# Altium PCB MAGI'sBoostPower.PcbDoc
Units mm, origin at the board's own origin, x right, y up, seen from the top; angles counter-clockwise.
Board outline 152.4 x 101.6 mm, 2 copper layers (Top Layer, Bottom Layer); 22 components, 13 nets, 98 pads, 109 vias.
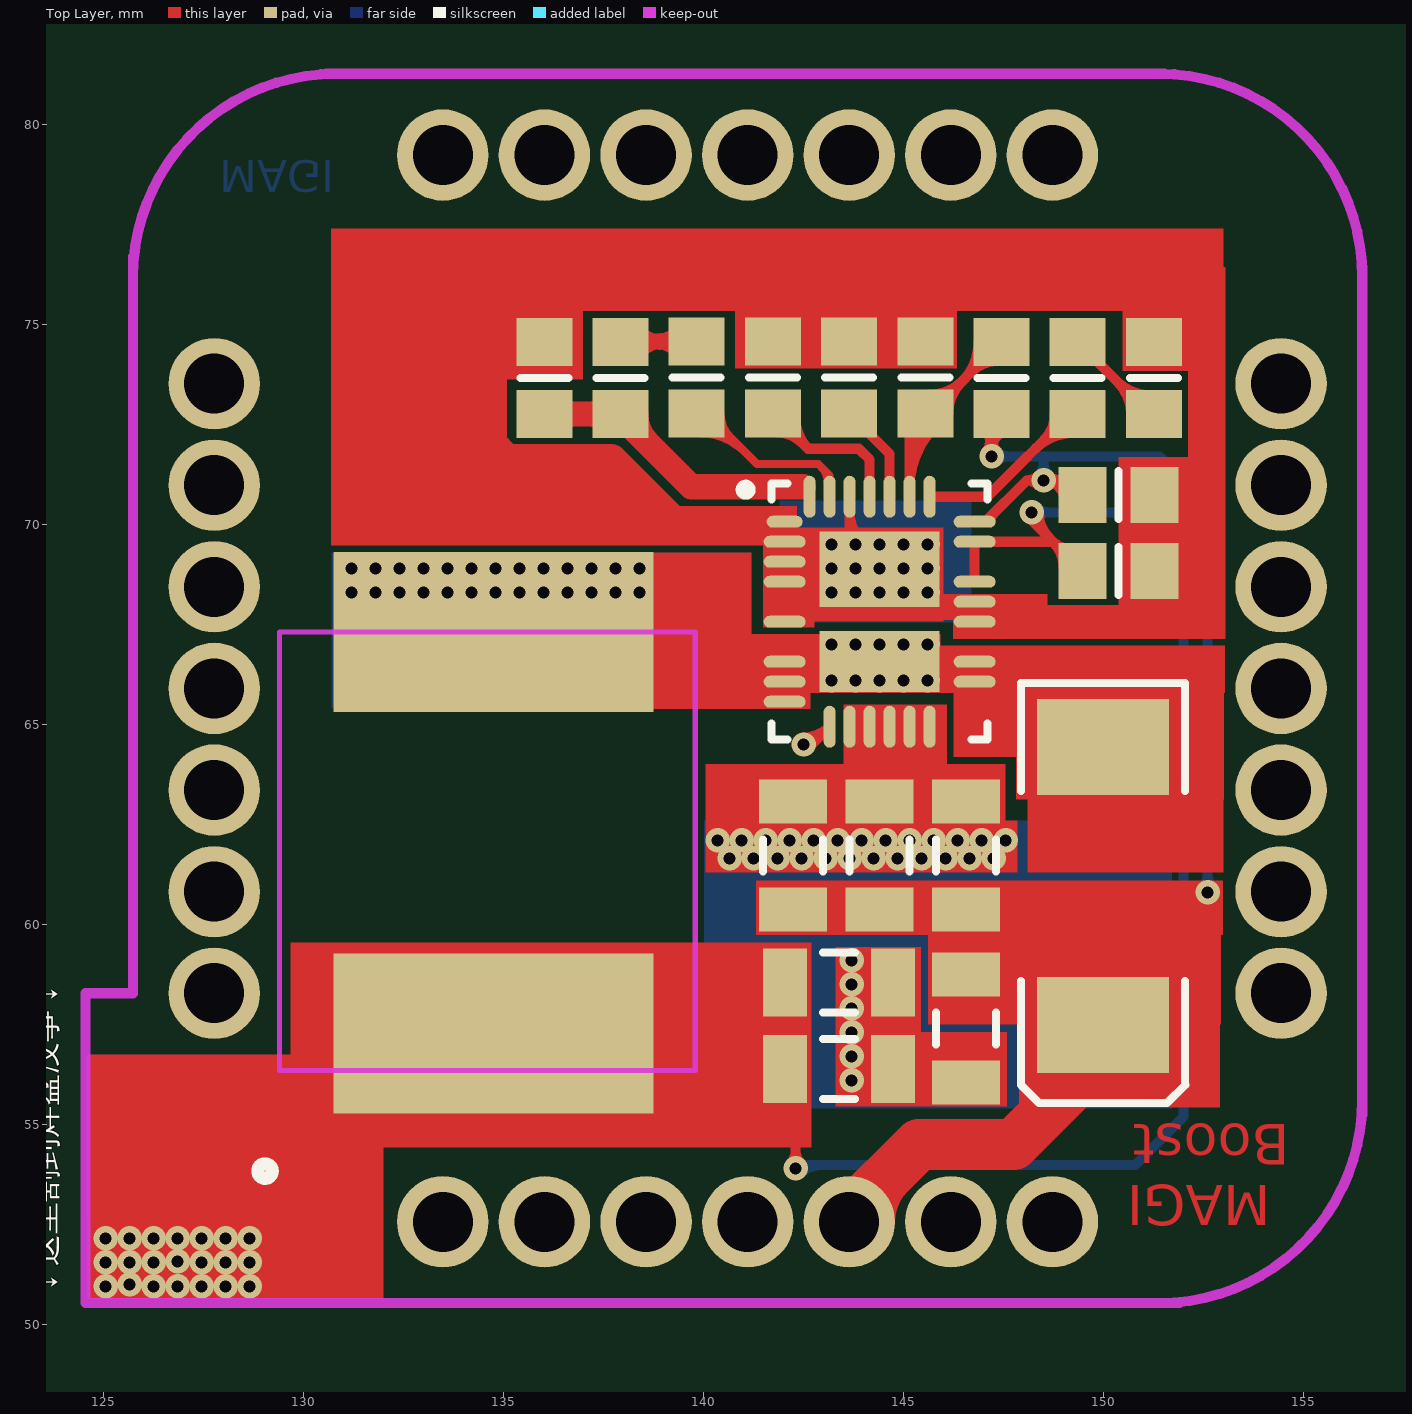
[diagram p0: Top Layer view]
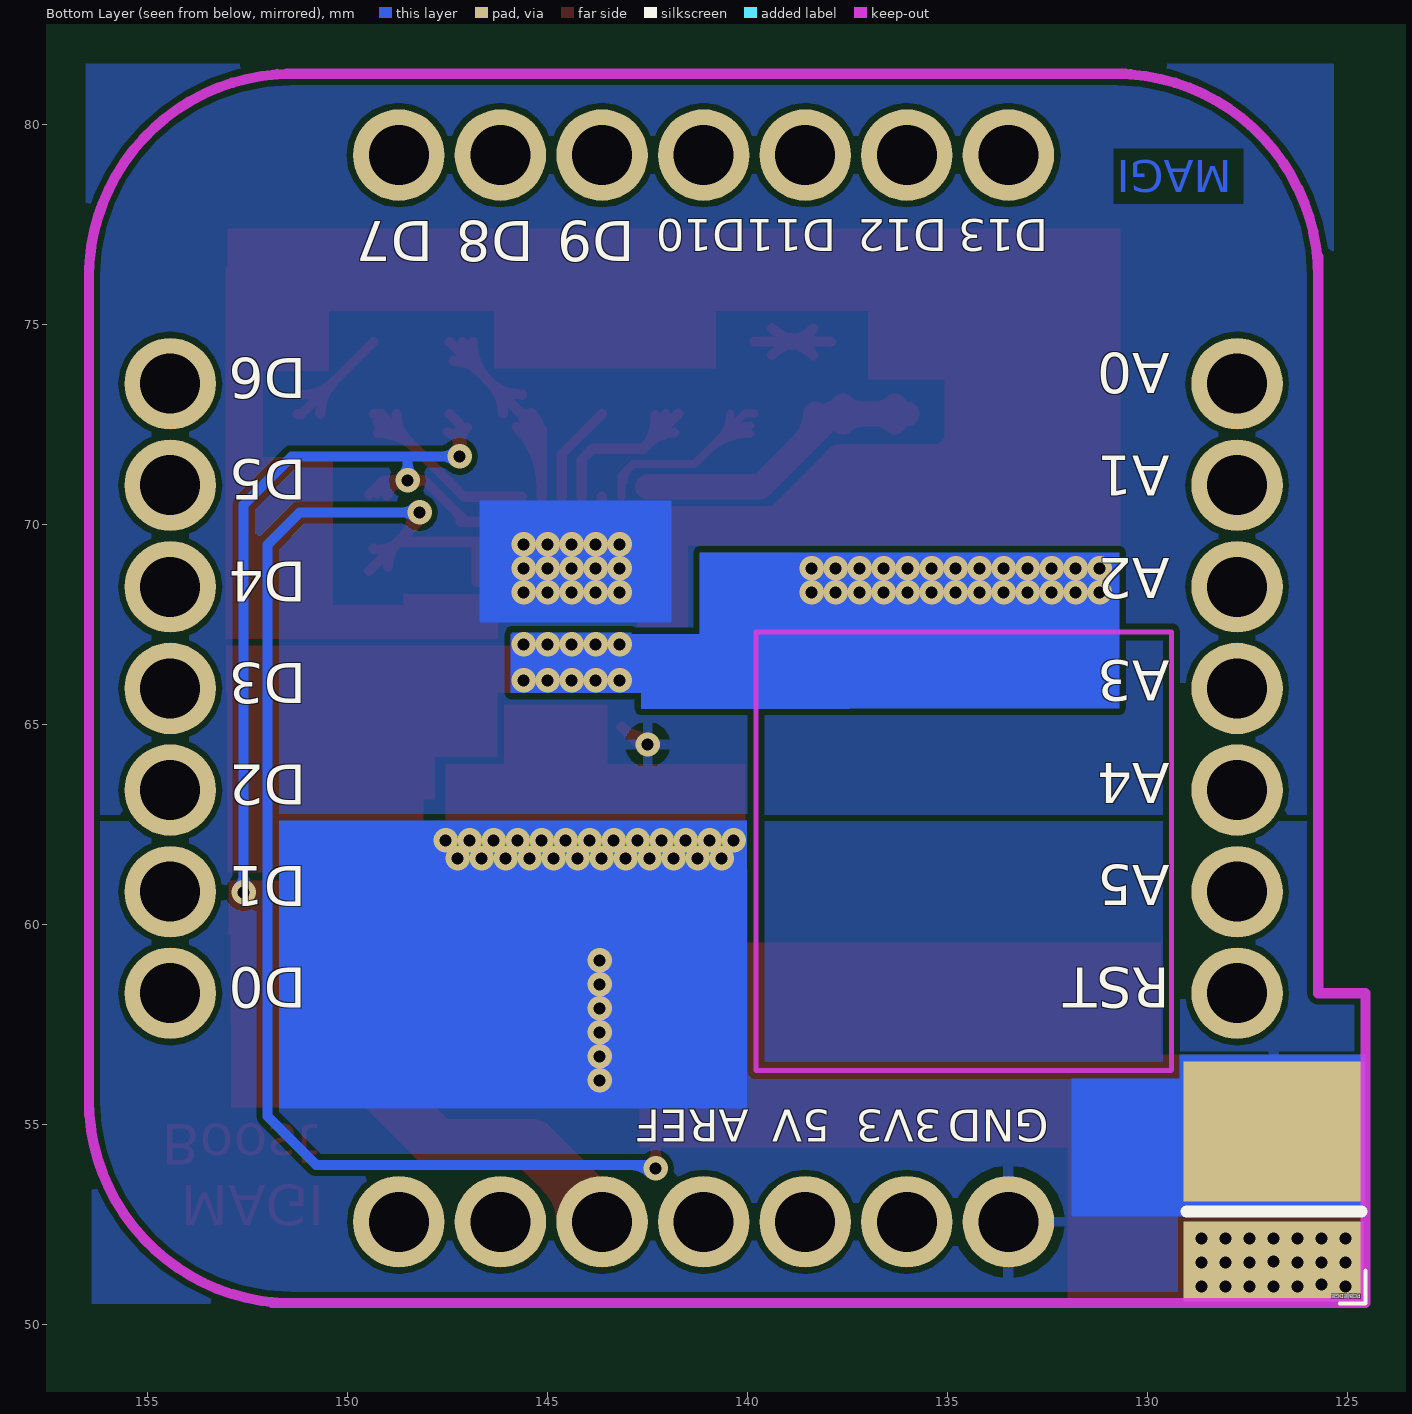
[diagram p1: Bottom Layer view, seen from below]

## Layer stack, top to bottom
Top Solder: solder mask 0.0102, Solder Resist, Dk 3.5
Top Layer: signal copper 0.0356
Dielectric 1: dielectric 0.32, FR-4, Dk 4.8
Bottom Layer: signal copper 0.0356
Bottom Solder: solder mask 0.0102, Solder Resist, Dk 3.5

## Board outline
25.4,25.4 177.8,25.4 177.8,127 25.4,127

## Design rules (kind name [scope] priority, off if disabled: settings)
Clearance [All] p1: gap=0.152
PolygonConnect [All] p1: connectstyle=Relief reliefconductorwidth=0.254 reliefentries=4 polygonreliefangle="90 Angle" airgapwidth=0.254
RoutingVias [All] p1: holewidth=0.711 width=1.27 viastyle="Through Hole" minholewidth=0.711 minwidth=1.27 maxholewidth=0.711 maxwidth=1.27
SolderMaskExpansion [All] p1: expansion=0.102
Width [All] p1: maxlimit=2.54 minlimit=0.152 preferedwidth=0.254
29 further rules are at their usual default settings.

## Components (designator, comment, footprint, x,y, rotation, side; value= is the part's Value field where it differs from the comment)
C1 "1uf" 6-0805_N 143.637,73.671 r90 top
C2 "1uf" 6-0805_N 149.352,73.66 r90 top
C3 "1uf" 6-0805_N 136.017,73.66 r90 top
C4 "CAP_1" C1206 144.399,61.722 r90 top
C5 "CAP_1" C1206 146.558,61.722 r90 top
C6 "CAP_1" C1206 142.24,61.722 r90 top
C7 "CAP_1" C1206 146.558,57.404 r270 top
C8 "CAP_1" C1206 143.383,58.547 r0 top
C9 "CAP_1" C1206 143.383,56.388 r0 top
C10 "CAP_1" 6-0805_n 150.368,70.739 r0 top
C11 "CAP_1" 6-0805_n 150.368,68.834 r0 top
D1 "DIODE_1" SMC 149.987,60.96 r270 top
D2 "LED_0805" 6-0805_n 137.922,73.66 r90 top
J1 "MAGIsBoard" MAGIsBoard 141.1,65.9 r180 top
J2 "CON2" T-Mini 126.85,53.2 r0 bottom
L1 "INDUCTOR" 10*10 134.747,62.23 r270 top
R1 "0805" 6-0805_N 151.257,73.66 r270 top
R2 "0805" 6-0805_N 145.542,73.671 r270 top
R3 "0805" 6-0805_N 141.732,73.671 r270 top
R4 "0805" 6-0805_N 139.827,73.671 r270 top
R5 "0805" 6-0805_N 147.447,73.66 r270 top
U1 "LT3959" LT3959 144.399,67.818 r270 top

## Footprints (in the part's own frame and the unit in brackets; to place one, negate y for a bottom-side part, rotate by r counter-clockwise, add the part's x,y. Pads: shape width x height; smd on the part's side, far side on the other; paste and mask are expansions set on the pad)
6-0805_N [mm] "Chip Resistor, Body 2.0x1.2mm, IPC Medium Density"
  rect 1.2x1.4 smd: 1(-0.9,0) 2(0.9,0)
  silkscreen extent 0,-0.6 0,0.6, body extent -1.07,-0.7 1.07,0.7, height 0.7
6-0805_n [mm] "Chip Resistor, Body 2.0x1.2mm, IPC Medium Density"
  rect 1.2x1.4 smd: 1(-0.9,0) 2(0.9,0)
  silkscreen extent 0,-0.6 0,0.6, body extent -1.07,-0.7 1.07,0.7, height 0.7
10*10 [mm]
  rect 4x8 smd: 1(-5.08,0) 2(4.953,0)
C1206 [mm] "Chip Capacitor, Body 3.2x1.6mm, IPC High Density"
  rect 1.1x1.7 smd: 1(-1.35,0) 2(1.35,0)
  silkscreen extent -0.4,-0.75 0.4,0.75, body extent -1.7,-0.9 1.7,0.9, height 1.3
LT3959 [mm]
  oval 0.3x0.9 smd: 1(-2.25,-2.375)
  oval 0.3x1.05 smd: 2(-1.75,-2.375) 3(-1.25,-2.375) 4(-0.75,-2.375) 6(0.25,-2.375) 8(1.25,-2.375) 9(1.75,-2.375) 10(2.25,-2.375) 20(1.75,2.375) 21(1.25,2.375) 23(0.25,2.375) 24(-0.25,2.375) 25(-0.75,2.375) 27(-1.75,2.375) 28(-2.25,2.375)
  oval 1.05x0.3 smd: 12(2.875,-1.25) 13(2.875,-0.75) 14(2.875,-0.25) 15(2.875,0.25) 16(2.875,0.75) 17(2.875,1.25) 30(-2.875,1.25) 31(-2.875,0.75) 32(-2.875,0.25) 33(-2.875,-0.25) 34(-2.875,-0.75) 35(-2.875,-1.25) 36(-2.875,-1.75)
  rect 1.88x3 smd: 37(-1.06,0)
  rect 1.53x3 smd: 38(1.245,0)
  silkscreen extent -3.2,-3.47 3.2,2.7, body extent -3.05,-2.55 3.05,2.55, height 0.8
MAGIsBoard [mil]
  round 90 hole 59.06: 1(300,525) 2(200,525) 3(100,525) 4(0,525) 5(-100,525) 6(-200,525) 7(-300,525) 8(-525,300) 9(-525,200) 10(-525,100) 11(-525,0) 12(-525,-100) 13(-525,-200) 14(-525,-300) 15(-300,-525) 16(-200,-525) 17(-100,-525) 18(0,-525) 19(100,-525) 20(200,-525) 21(300,-525) 22(525,-300) 23(525,-200) 24(525,-100) 25(525,0) 26(525,100) 27(525,200) 28(525,300)
  Keep-Out Layer lines w10: 605,300 605,-425 ; 605,-405 cw(c405,-405) 405,-605 ; 425,605 -425,605 ; 415,-605 -410,-605 ; -405,605 ccw(c-405,405) -605,405 ; -405,-605 cw(c-405,-405) -605,-405 ; -605,420 -605,290 -605,-415
  silkscreen extent 468,468 482,482
SMC [mm] "DO-214-AB/SMC; 2 C-Bend Leads; Body 7.9 x 5.9 mm, inc. leads (LxW)"
  rect 2.4x3.3 smd: 1(-3.475,0) 2(3.475,0)
  silkscreen extent -5.07,-2.05 5.43,2.05
T-Mini [mm]
  rect 4.5x2 smd: 1(0,1.625)
  rect 4.5x3.5 smd: 2(0,-1.625)
  silkscreen extent -2.3,0.38 2.18,2.68

## Part data
C1 C2 C3: library part CAP_1, "Capacitor"
C4 C5 C6 C7 C8 C9 C10 C11: "Capacitor"
D1: "Diode"
D2: "LED"
J2: "Connector"
R1 R2 R3 R4 R5: library part RES1_1

## Via types
v1: diameter 0.61, hole 0.305, Top Layer to Bottom Layer, 109 vias

## Nets (pads, with @x,y where several pads share a name; then routed paths per layer and width w, separated by ;. In a path a pad name is that pad's centre, name@x,y a point inside that pad or via, vN(x,y) a via of type N, cw(c..) or ccw(c..) an arc to the next point about the centre after c; other vN are vias at no path point)
GND: C1.2 C3.2 C10.2 C11.2 R1.1 R2.1 R3.1 U1.1 U1.2 U1.3 U1.4 U1.6 U1.12 U1.23 U1.24 U1.34 U1.37 | length 30.2
  Top Layer w0.254: 140.38,69.95 140.498,70.068 ; R3.1 R2.1 ; R3.1@142.166,74.237 cw(c142.974,73.429) 142.974,74.571 cw(c142.974,75.713) R3.1@142.166,74.905 ; R3.1@142.22,74.3 cw(c142.602,74.033) 142.722,74.483 ; R3.1@142.22,74.842 ccw(c142.602,75.109) 142.722,74.659 ; R3.1@142.242,74.334 cw(c142.8,74.012) 142.633,74.635 ; R3.1@142.242,74.807 ccw(c142.8,75.13) 142.633,74.507 ; v1(142.5,64.5) 142.706,64.5 U1.12 cw(c142.508,65.584) v1@142.501,64.678 ; C1.2@143.203,74.237 ccw(c142.395,73.429) 142.395,74.571 ccw(c142.395,75.713) C1.2@143.203,74.905 ; U1.34@143.649,70.294 ccw(c144.594,70.294) U1.37@143.926,69.626 ; U1.34 U1.37@143.649,69.628 ; U1.37@143.667,69.018 ccw(c143.334,69.313) U1.37@143.649,69.628 ; U1.37@143.8,69.322 cw(c143.8,68.948) U1.37@144.064,69.213 ; U1.37@143.84,69.437 cw(c143.536,69.134) U1.37@143.857,68.849 ; U1.37@143.961,69.432 ccw(c144.619,69.811) U1.37@144.442,69.073 ; U1.37@143.978,69.5 ccw(c144.463,69.5) U1.37@144.12,69.157 ; U1.37@144.057,69.22 ccw(c144.4,69.563) U1.37@144.4,69.078 ; C1.2@144.071,74.237 cw(c144.879,73.429) 144.879,74.571 cw(c144.879,75.713) C1.2@144.071,74.905 ; U1.37@144.087,69.214 ccw(c144.332,69.356) U1.37@144.374,69.076 ; U1.37@144.113,69.164 cw(c143.848,68.9) U1.37@144.222,68.9 ; U1.37 U1.37@143.649,69.628 ; 144.552,74.483 cw(c144.672,74.033) R2.1@145.054,74.3 ; 144.552,74.659 ccw(c144.672,75.109) R2.1@145.054,74.842 ; 144.641,74.507 ccw(c144.474,75.13) R2.1@145.032,74.807 ; 144.641,74.635 cw(c144.474,74.012) R2.1@145.032,74.334 ; R2.1@145.108,74.237 ccw(c144.3,73.429) 144.3,74.571 ccw(c144.3,75.713) R2.1@145.108,74.905
  Top Layer w0.889: 134.593,72.087 134.593,72.04 135.07,71.563 137.68,71.563 139.293,69.95 140.38,69.95
  other v1: 143.2,68.3 143.8,68.3 144.4,68.3 145,68.3 145.6,68.3 143.2,68.9 143.8,68.9 144.4,68.9 145,68.9 145.6,68.9 143.2,69.5 143.8,69.5 144.4,69.5 145,69.5 145.6,69.5
NetC1_1: C1.1 U1.32 | length 2.5
  Top Layer w0.254: C1.1 144.649,71.759 U1.32
NetC2_1: C2.1 U1.30 | length 6.9
  Top Layer w0.254: U1.30 147.093,70.693 149.16,72.76 C2.1 ; 148.287,71.887 cw(c149.252,70.923) C2.1@149.252,72.287 ; 148.51,72.11 ccw(c147.859,72.76) C2.1@148.779,72.76 ; C2.1@148.721,72.321 cw(c149.252,71.79) C2.1@149.252,72.541
NetC2_2: C2.2 R1.2 | length 4.4
  Top Layer w0.254: C2.2 151.152,72.76 R1.2 ; 150.341,73.571 ccw(c151.157,74.387) R1.2@151.157,73.233 ; 150.353,73.559 cw(c149.554,72.76) R1.2@150.684,72.76
NetC3_1: C3.1 D2.1 U1.36 | length 10.2
  Top Layer w0.635: C3.1 D2.1 137.922,72.711 139.694,70.939 142.494,70.939 ; C3.1@136.317,72.56 cw(c136.799,72.078) 136.799,72.76 cw(c136.799,73.442) C3.1@136.317,72.96 ; D2.1@137.622,72.56 ccw(c137.14,72.078) 137.14,72.76 ccw(c137.14,73.442) D2.1@137.622,72.96 ; D2.1@138.304,72.76 ccw(c139.345,72.76) 138.609,72.024
NetD2_2: D2.2 R4.1 | length 7.6
  Top Layer w0.254: D2.2 137.933,74.571 R4.1 ; D2.2@138.356,74.226 cw(c139.19,73.392) R4.1@139.19,74.571 ; D2.2@138.356,74.894 ccw(c139.137,75.675) R4.1@139.137,74.571 ; D2.2@138.399,74.846 ccw(c138.8,75.149) 138.93,74.663 ; D2.2@138.42,74.305 cw(c138.783,74.072) 138.894,74.488 ; D2.2@138.432,74.324 cw(c139.021,73.983) 138.845,74.641 ; D2.2@138.432,74.796 ccw(c138.958,75.101) 138.801,74.513 ; R4.1@139.393,74.237 ccw(c138.585,73.429) 138.585,74.571 ccw(c138.585,75.713) R4.1@139.393,74.905
NetR2_2: R2.2 R5.1 U1.31 | length 12.7
  Top Layer w0.254: U1.31 145.149,72.378 R2.2 145.658,72.771 R5.1 ; U1.31@145.149,70.922 cw(c147.291,70.922) R2.2@145.776,72.437 ; 145.149,71.535 cw(c146.678,71.535) R2.2@145.597,72.616 ; 145.149,72.148 cw(c146.065,72.148) R2.2@145.417,72.796 ; R2.2@145.642,73.244 ccw(c145.642,74.425) 146.477,73.59 ; R2.2@146.115,72.771 cw(c147.218,72.771) 146.438,73.551 ; 146.469,73.582 ccw(c145.491,74.56) R5.1@146.874,74.56 ; 146.71,73.823 cw(c147.347,73.187) R5.1@147.347,74.087 ; R5.1@146.902,74.015 ccw(c146.358,74.56) R5.1@147.128,74.56
NetR3_2: R3.2 U1.33 | length 6
  Top Layer w0.254: R3.2 142.611,71.892 ; R3.2@141.832,72.298 cw(c141.832,71.398) 142.469,72.034 ; R3.2@142.05,72.753 ccw(c142.648,72.703) R3.2@142.224,72.279 ; R3.2@142.303,72.732 ccw(c143.364,72.644) 142.611,71.892 ; U1.33 144.149,71.624 143.881,71.892 142.611,71.892
NetR4_2: R4.2 U1.35 | length 7.6
  Top Layer w0.203: R4.2 140.073,72.771 141.333,71.511 142.865,71.511 143.149,71.227 U1.35 ; R4.2@139.927,72.273 cw(c139.927,70.717) 141.027,71.817 ; R4.2@139.927,72.476 cw(c139.927,71.411) 140.68,72.164 ; R4.2@140.425,72.771 ccw(c141.277,72.771) 140.675,72.169 ; 142.954,71.422 cw(c142.6,71.068) U1.35@143.101,71.068
PGND: C4.2 C5.2 C6.2 C7.2 C8.2 C9.2 J1.1 J2.2 U1.13 U1.14 U1.15 U1.16 U1.17
  other v1: 143.7,56.1 143.7,56.7 143.7,57.3 143.7,57.9 143.7,58.5 143.7,59.1 140.65,61.65 141.25,61.65 141.85,61.65 142.45,61.65 143.05,61.65 143.65,61.65 144.25,61.65 144.85,61.65 145.45,61.65 146.05,61.65 146.65,61.65 147.25,61.65 140.35,62.1 140.95,62.1 141.55,62.1 142.15,62.1 142.75,62.1 143.35,62.1 143.95,62.1 144.55,62.1 145.15,62.1 145.75,62.1 146.35,62.1 146.95,62.1 147.55,62.1
SW: D1.1 L1.1 U1.8 U1.9 U1.10 U1.20 U1.21 U1.38
  other v1: 143.2,66.1 143.8,66.1 144.4,66.1 145,66.1 145.6,66.1 143.2,67 143.8,67 144.4,67 145,67 145.6,67 131.2,68.3 131.8,68.3 132.4,68.3 133,68.3 133.6,68.3 134.2,68.3 134.8,68.3 135.4,68.3 136,68.3 136.6,68.3 137.2,68.3 137.8,68.3 138.4,68.3 131.2,68.9 131.8,68.9 132.4,68.9 133,68.9 133.6,68.9 134.2,68.9 134.8,68.9 135.4,68.9 136,68.9 136.6,68.9 137.2,68.9 137.8,68.9 138.4,68.9
VIN: C8.1 C9.1 C11.1 J2.1 L1.2 U1.25 U1.27 | length 41.1
  Top Layer w0.254: v1@142.174,54.026 ccw(c141.871,54.329) 142.3,54.329 ccw(c142.729,54.329) v1@142.426,54.026 ; 142.2,55.15 142.3,55.15 v1(142.3,53.9) ; U1.25 U1.27 148.734,69.568 ; v1(148.2,70.3) 148.2,70.102 148.734,69.568 ; v1@148.378,70.3 ccw(c149.285,70.3) 148.644,69.658 ; C11.1@148.995,68.935 ccw(c148.104,68.938) 148.734,69.568 ; C11.1@149.356,69.394 cw(c149.2,70.034) 148.734,69.568 ; C11.1 148.734,69.568
  Top Layer w0.508: C9.1@141.824,55.879 cw(c141.318,55.373) 142.033,55.373 cw(c142.748,55.373) C9.1@142.242,55.879 ; 142.033,55.367 C9.1
  Bottom Layer w0.254: v1(142.3,53.9) 142.387,53.987 150.787,53.987 152,55.2 152,69.5 151.2,70.3 v1(148.2,70.3) ; v1@142.426,53.774 cw(c142.94,53.26) 142.94,53.987 ; v1@148.326,70.174 cw(c148.629,69.871) 148.629,70.3 cw(c148.629,70.729) v1@148.326,70.426
  other v1: 125.05,50.95 126.25,50.95 126.85,50.95 127.45,50.95 128.05,50.95 128.65,50.95 125.65,51 125.05,51.55 125.65,51.55 126.25,51.55 127.45,51.55 128.05,51.55 128.65,51.55 126.85,51.575 125.05,52.15 125.65,52.15 126.25,52.15 126.85,52.15 127.45,52.15 128.05,52.15 128.65,52.15
VOUT: C4.1 C5.1 C6.1 C7.1 C10.1 D1.2 J1.5 R5.2 U1.28 | length 38.1
  Top Layer w0.254: U1.28 147.043,70.068 148.075,71.1 ; R5.2@147.013,72.426 cw(c146.56,71.973) v1@147.2,71.973 ; v1@147.065,71.815 ccw(c146.764,72.072) R5.2@147.146,72.175 ; v1@147.074,71.826 ccw(c146.771,72.129) 147.2,72.129 ccw(c147.629,72.129) v1@147.326,71.826 ; v1@147.111,71.854 ccw(c146.979,72.082) 147.234,72.014 ; U1.28@147.172,70.068 cw(c147.484,70.068) 147.263,70.289 ; v1@147.2,71.888 cw(c147.651,71.888) R5.2@147.503,72.313 ; v1@147.2,71.9 147.2,72.513 R5.2 ; 147.239,72.032 ccw(c147.409,71.986) v1@147.305,71.844 ; v1@148.373,70.975 ccw(c148.075,70.68) 148.075,71.1 ; v1@148.373,71.225 cw(c148.075,71.52) 148.075,71.1 ; v1@148.626,70.974 cw(c148.929,70.671) 148.929,71.1 cw(c148.929,71.529) v1@148.626,71.226 ; 148.835,71.1 cw(c148.835,70.662) C10.1@149.257,70.78 ; C10.1@149.013,70.711 ccw(c148.5,70.568) v1(148.5,71.1) ; C10.1 149.107,71.1 v1(148.5,71.1) ; 148.075,71.1 v1(148.5,71.1)
  Top Layer w1.27: J1.5 143.64,52.755 145.38,54.495 147.749,54.495 149.987,56.733 D1.2 ; J1.5@144.148,52.565 cw(c145.833,52.565) 144.642,53.757
  Bottom Layer w0.254: v1(147.2,71.7) 148.5,71.7 ; v1@147.326,71.574 cw(c147.629,71.271) 147.629,71.7 cw(c147.629,72.129) v1@147.326,71.826 ; v1@148.374,71.226 ccw(c148.071,71.529) 148.5,71.529 ccw(c148.929,71.529) v1@148.626,71.226 ; v1(148.5,71.1) 148.5,71.7 ; v1@152.474,60.926 ccw(c152.171,61.229) 152.6,61.229 ccw(c153.029,61.229) v1@152.726,60.926 ; v1(152.6,60.8) 152.6,70.5 151.4,71.7 148.5,71.7
pads on no net: J1.2 J1.3 J1.4 J1.6 J1.7 J1.8 J1.9 J1.10 J1.11 J1.12 J1.13 J1.14 J1.15 J1.16 J1.17 J1.18 J1.19 J1.20 J1.21 J1.22 J1.23 J1.24 J1.25 J1.26 J1.27 J1.28

## Polygon pours and split planes (outlines as drawn)
PGND on Bottom Layer "Keep-Out Layer-No Net" (solid, pour order 3): 141.176,62.582 156.426,62.582 156.393,62.582 156.393,50.515 124.476,50.515 124.476,58.262 125.526,58.262 125.626,58.262 125.626,62.582
GND on Bottom Layer "Keep-Out Layer-No Net" (solid, pour order 2): 125.35,81.52 156.55,81.52 156.55,50.42 124.2,50.42 124.2,58.47 125.35,58.47

## Keep-outs
Keep-Out Layer:
  lines w0.127: 129.4,56.35 139.79,56.35 139.79,67.31 129.4,67.31 129.4,56.35
  lines w0.254: 125.733,58.28 124.55,58.28 124.55,50.533 133.55,50.533

## Other copper
Top Layer:
  rectangle net SW: 148.1,61.3 153,64
  rectangle net PGND: 147.15,61.3 147.85,62.6
  rectangle net VIN: 124.6,50.65 132,56.75
  rectangle net GND: 141.49,67.42 142.77,69.82
  rectangle net GND: 141.49,67.57 146,69.92
  rectangle net GND: 141.49,69.92 142.34,70.46
  rectangle net GND: 130.68,69.47 142.34,70.46
  rectangle net GND: 130.68,69.56 135.08,76.43
  rectangle net GND: 134.97,70.11 137.98,71.88
  rectangle net GND: 137.39,70.04 138.52,71.1
  rectangle net GND: 145.18,67.61 148.6,68.26
  rectangle net GND: 146.24,67.14 152.19,67.98
  rectangle net GND: 150.37,67.14 153.05,71.68
  rectangle net GND: 152.11,71.47 153.05,76.43
  rectangle net GND: 130.68,75.33 153,77.4
  rectangle net GND: 140.79,73.9 146.34,75.65
  rectangle net GND: 150.47,73.84 152.47,75.51
  rectangle net GND: 134.76,73.62 136.99,75.59
  rectangle net SW: 145.923,65.786 153.04,66.97
  rectangle net SW: 147.81,63.12 153.01,66.16
  rectangle net VOUT: 141.31,59.73 152.98,61.1
  rectangle net VOUT: 145.61,57.5 152.93,60.41
  rectangle net VOUT: 147.89,55.42 152.91,57.9
  rectangle net PGND: 143.3,55.45 145.44,59.43
  rectangle net PGND: 143.5,55.45 147.59,57.31
  rectangle net VIN: 129.67,54.42 142.7,59.55
  rectangle net PGND: 143.5,61.81 146.09,65.5
  rectangle net PGND: 140.05,61.3 147.55,64.01
  rectangle net SW: 146.25,64.19 147.93,66.06
  rectangle net SW: 137.44,65.39 142.67,66.2
  rectangle net SW: 138.7,66.42 141.2,69.3
  rectangle net SW: 137.922,65.786 145.923,67.26
  text "Boost" at 154.65,55 h1.02 r180
  text "MAGI" at 154.178,53.484 h1 r180
Bottom Layer:
  rectangle net PGND: 128.7,52.7 131.9,56.15
  rectangle net PGND: 124.55,52.7 129.2,56.75
  rectangle net PGND: 140.01,55.4 151.715,62.6
  rectangle net SW: 137.44,65.39 142.67,66.2
  rectangle net SW: 138.7,66.42 141.2,69.3
  rectangle net SW: 137.922,65.786 145.923,67.26
  rectangle net SW: 130.7,65.4 139,69.3
  rectangle net SW: 142.9,66.2 145.9,67.3
  rectangle net GND: 141.9,67.55 146.7,70.6

## Silkscreen, mask and mechanical layers (free items; w line width, h text height)
Top Overlay:
  text "↓这里割到焊盘没事↓" at 124,50.65 h1 r90
Top Solder:
  rectangle: 138.5,65.3 141.1,69.3
Bottom Solder:
  rectangle: 142.8,67.9 146,69.9
  rectangle: 142.9,65.9 145.9,67.3
  rectangle: 130.7,65.3 141.1,69.3
  rectangle: 141.1,65.4 142.6,67.3

## Text inside footprints (layer, text, board x,y; h text height)
J1: Bottom Overlay "D0" at 151.032,58.913 h1 r180; Bottom Overlay "D1" at 151.032,61.453 h1 r180; Bottom Overlay "D2" at 151.032,63.993 h1 r180; Bottom Overlay "D3" at 151.032,66.533 h1 r180; Bottom Overlay "D4" at 151.032,69.073 h1 r180; Bottom Overlay "D5" at 151.032,71.613 h1 r180; Bottom Overlay "D6" at 151.032,74.153 h1 r180; Bottom Overlay "D7" at 147.857,77.582 h1 r180; Bottom Overlay "D8" at 145.342,77.582 h1 r180; Bottom Overlay "D9" at 142.828,77.582 h1 r180; Bottom Overlay "D10" at 140.034,77.636 h0.8 r180; Bottom Overlay "D11" at 137.786,77.636 h0.8 r180; Bottom Overlay "D12" at 135.005,77.636 h0.8 r180; Bottom Overlay "D13" at 132.49,77.636 h0.8 r180; Bottom Overlay "A0" at 129.442,74.28 h1 r180; Bottom Overlay "A1" at 129.442,71.719 h1 r180; Bottom Overlay "A2" at 129.442,69.158 h1 r180; Bottom Overlay "A3" at 129.442,66.597 h1 r180; Bottom Overlay "A4" at 129.442,64.035 h1 r180; Bottom Overlay "A5" at 129.442,61.474 h1 r180; Bottom Overlay "RST" at 129.442,58.913 h1 r180; Bottom Overlay "GND" at 132.475,55.363 h0.8 r180; Bottom Overlay "3V3" at 135.142,55.363 h0.8 r180; Bottom Overlay "5V" at 137.936,55.363 h0.8 r180; Bottom Overlay "AREF" at 139.968,55.363 h0.8 r180; Bottom Layer "MAGI" at 127.892,79.108 h0.8 r180
J2: Bottom Overlay "PCB EDGE" at 124.67,50.755 h0.1 r180